# Altium PCB Mekatron.PcbDoc
Units mm, origin at the board's own origin, x right, y up, seen from the top; angles counter-clockwise.
Board outline 120 x 130 mm, 4 copper layers (Top Layer, Internal Plane 1, Internal Plane 2, Bottom Layer), stack 0.462 mm thick; 15 components, 49 nets, 206 pads, 0 vias.
Unrouted connection lines stored in the file: 1.
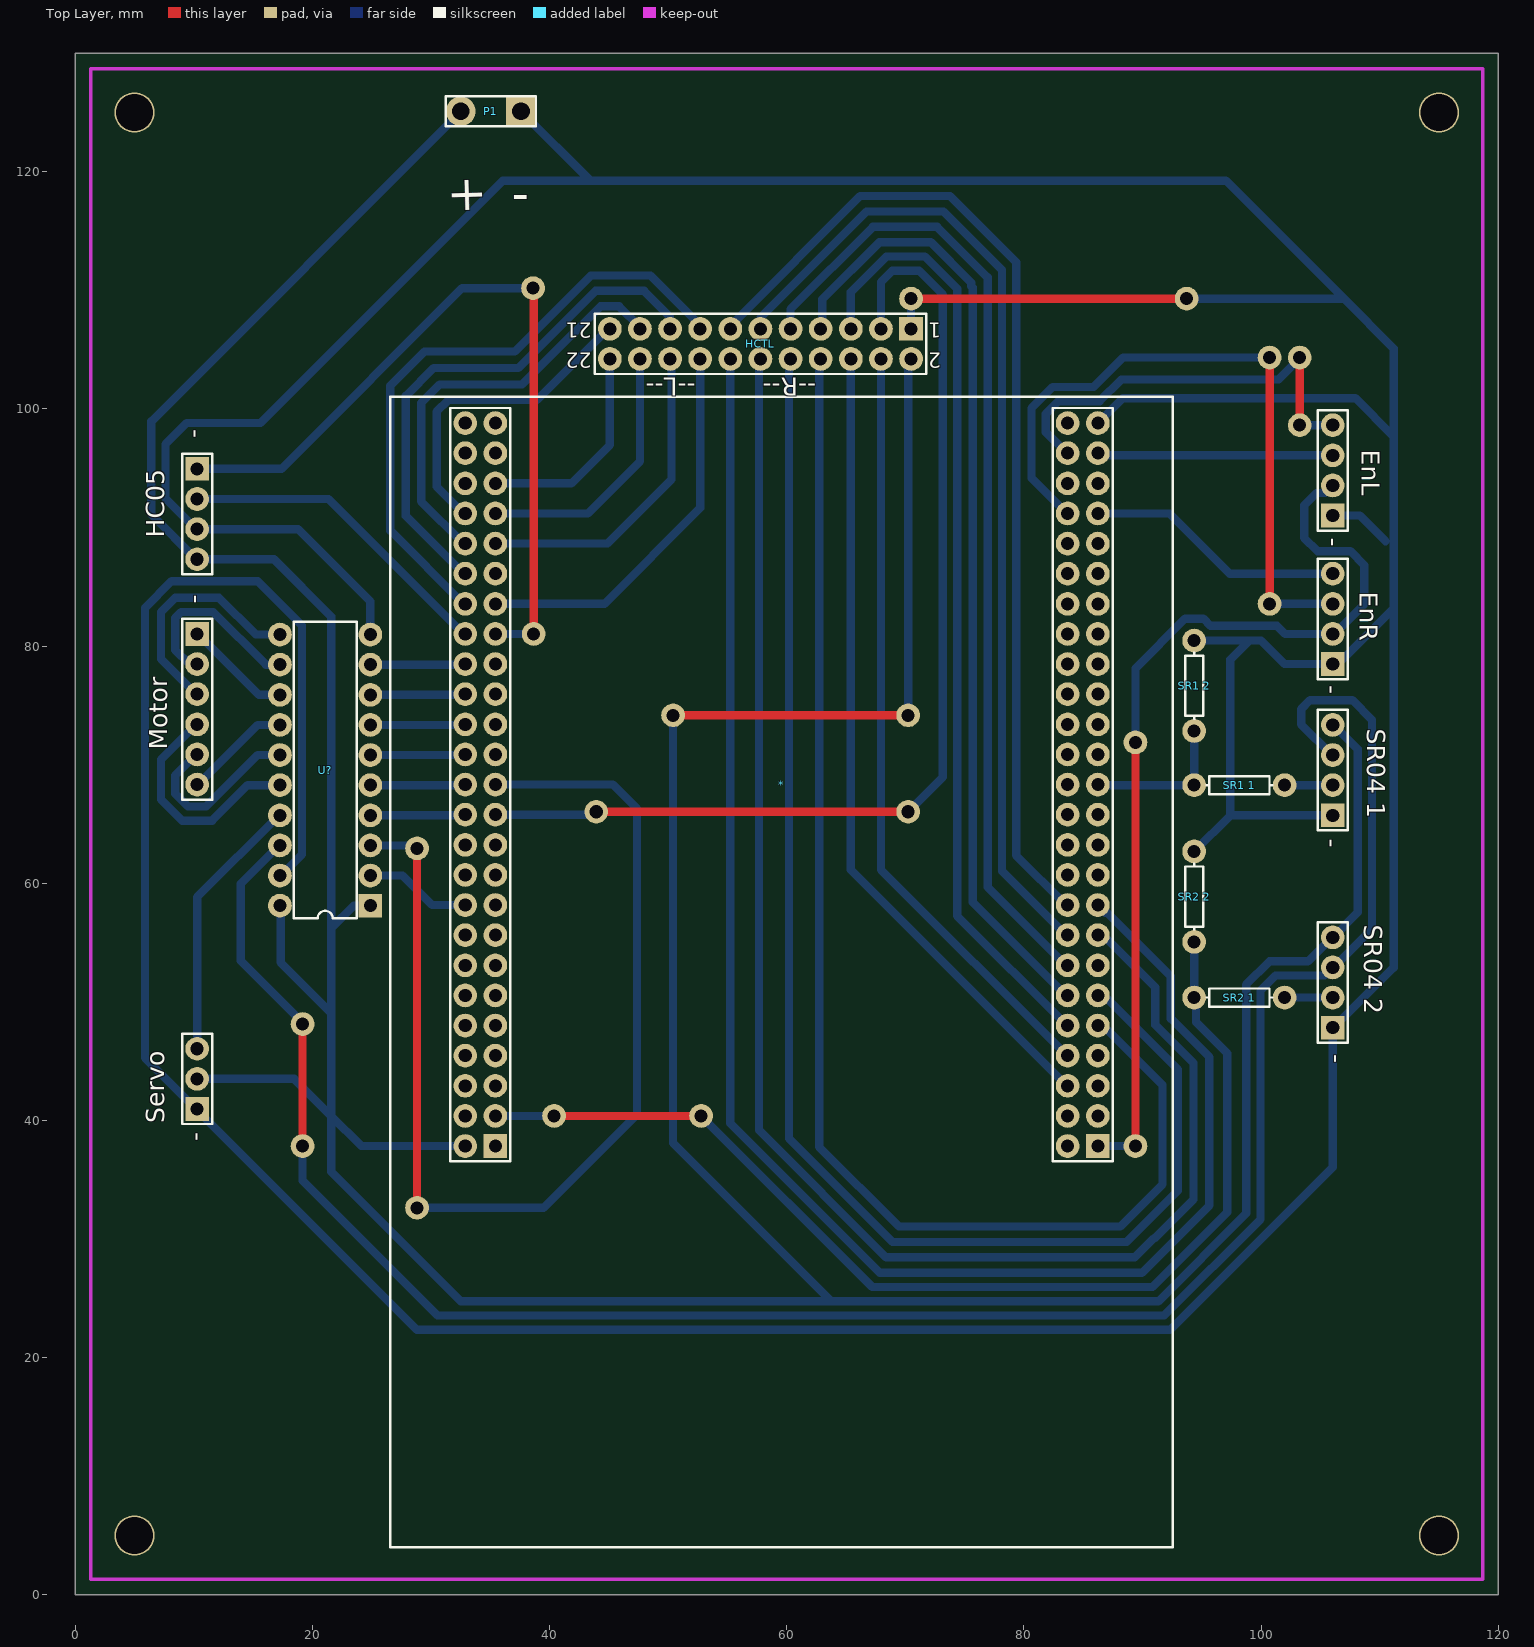
[diagram p0: Top Layer view]
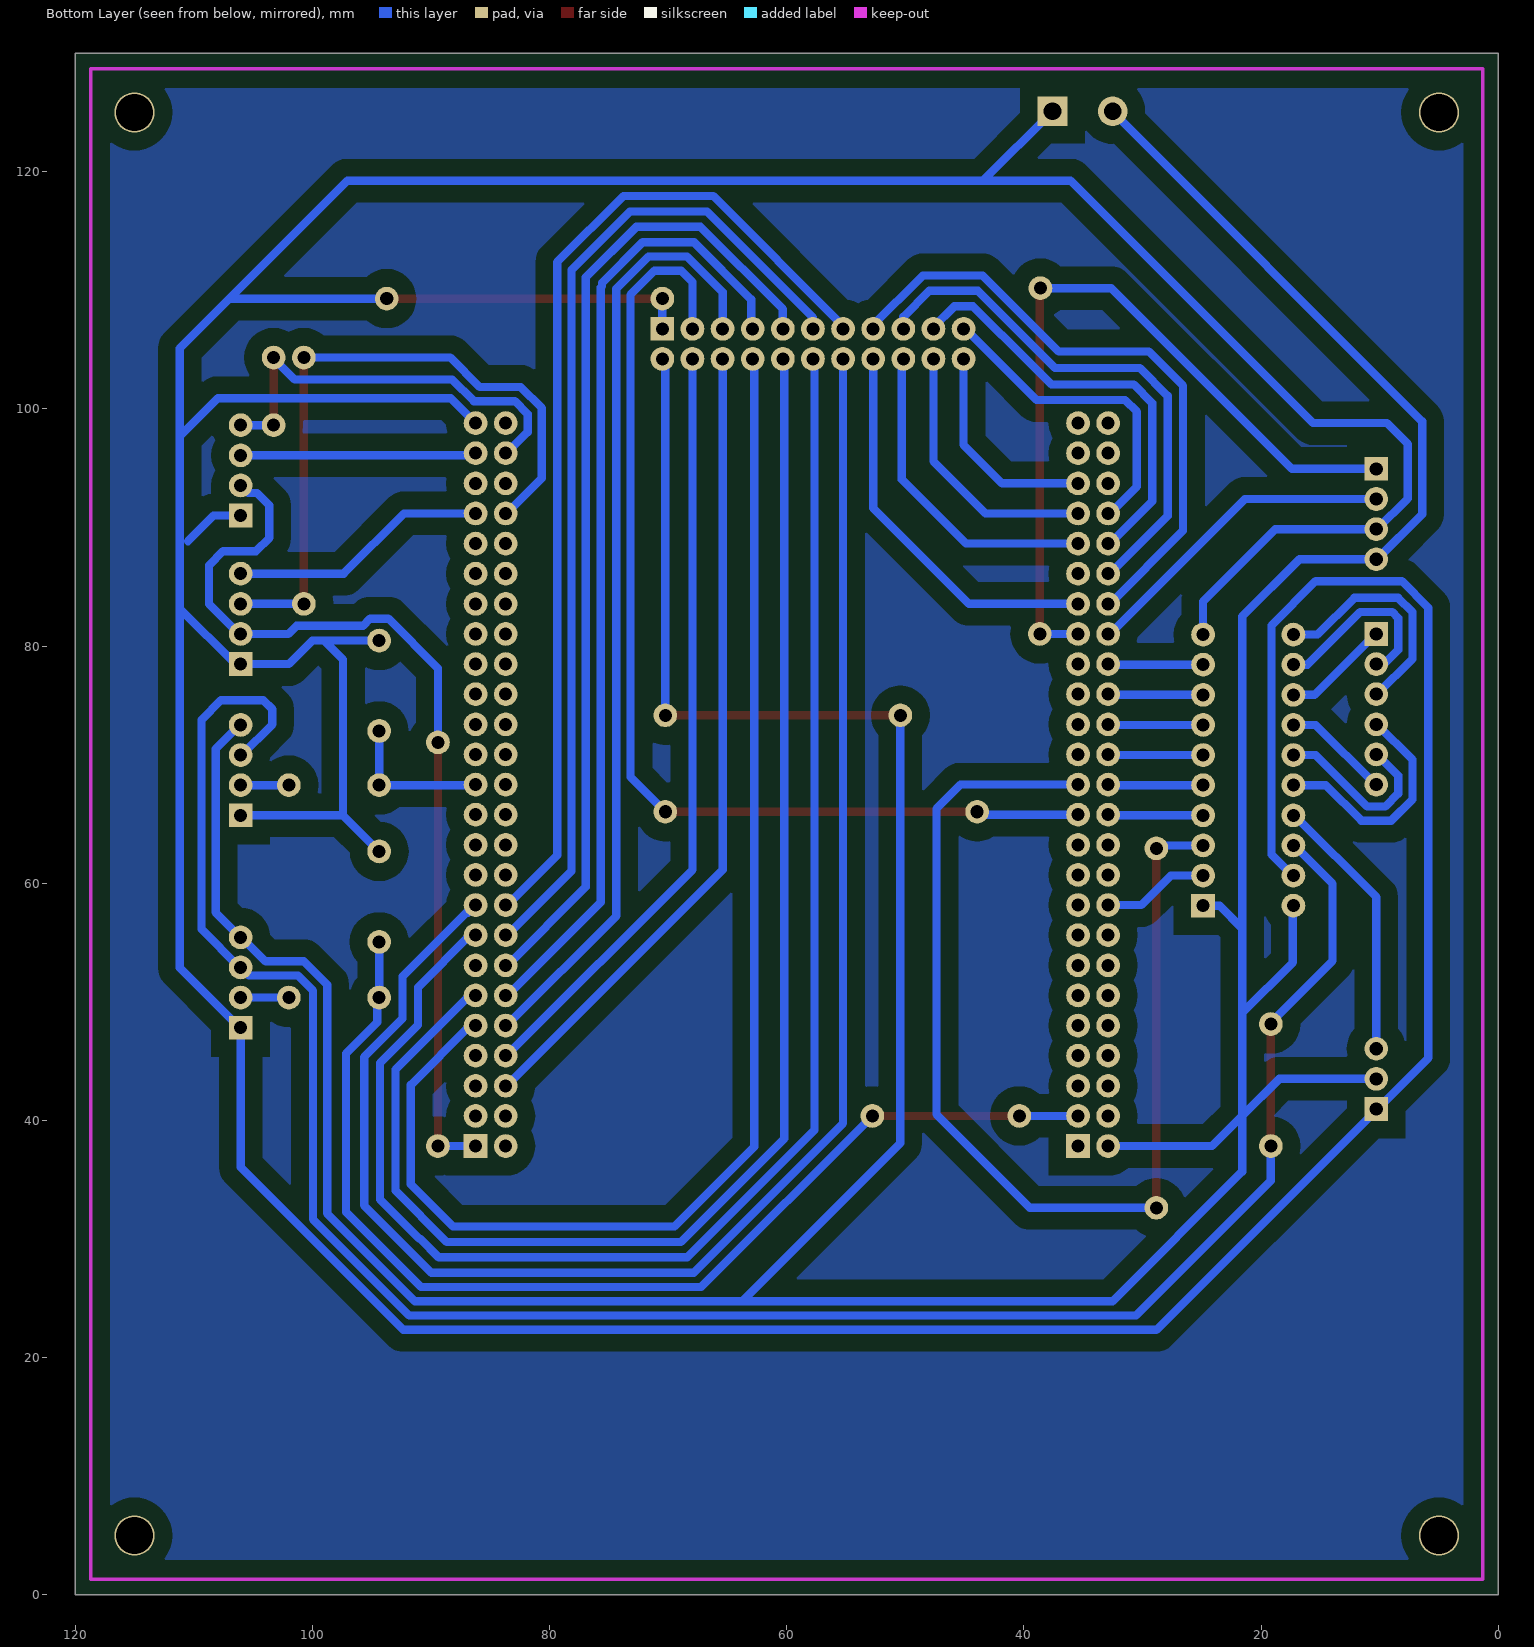
[diagram p1: Bottom Layer view, seen from below]
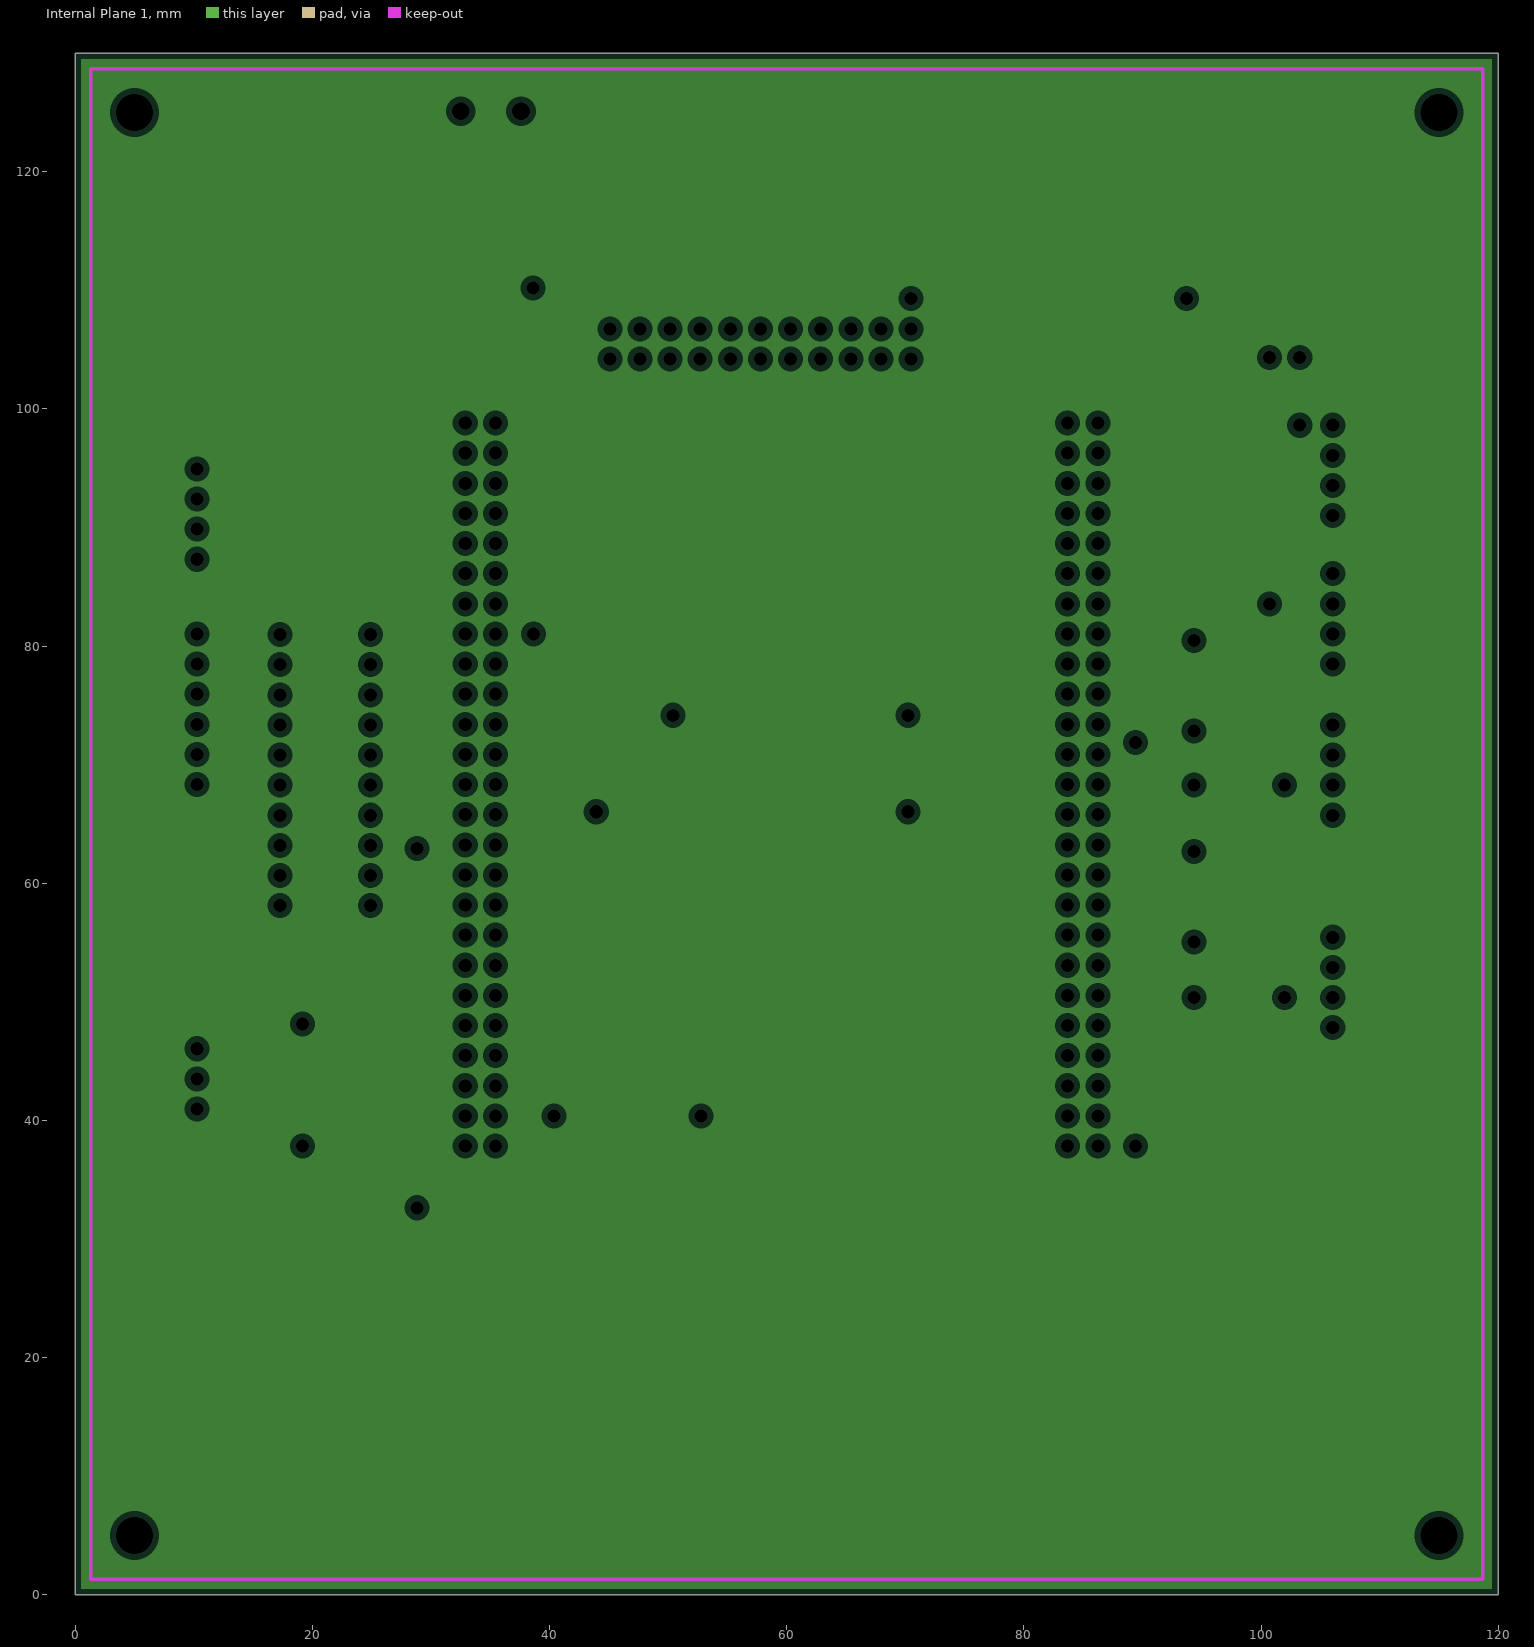
[diagram p2: Internal Plane 1, clearances drawn from the general rule]
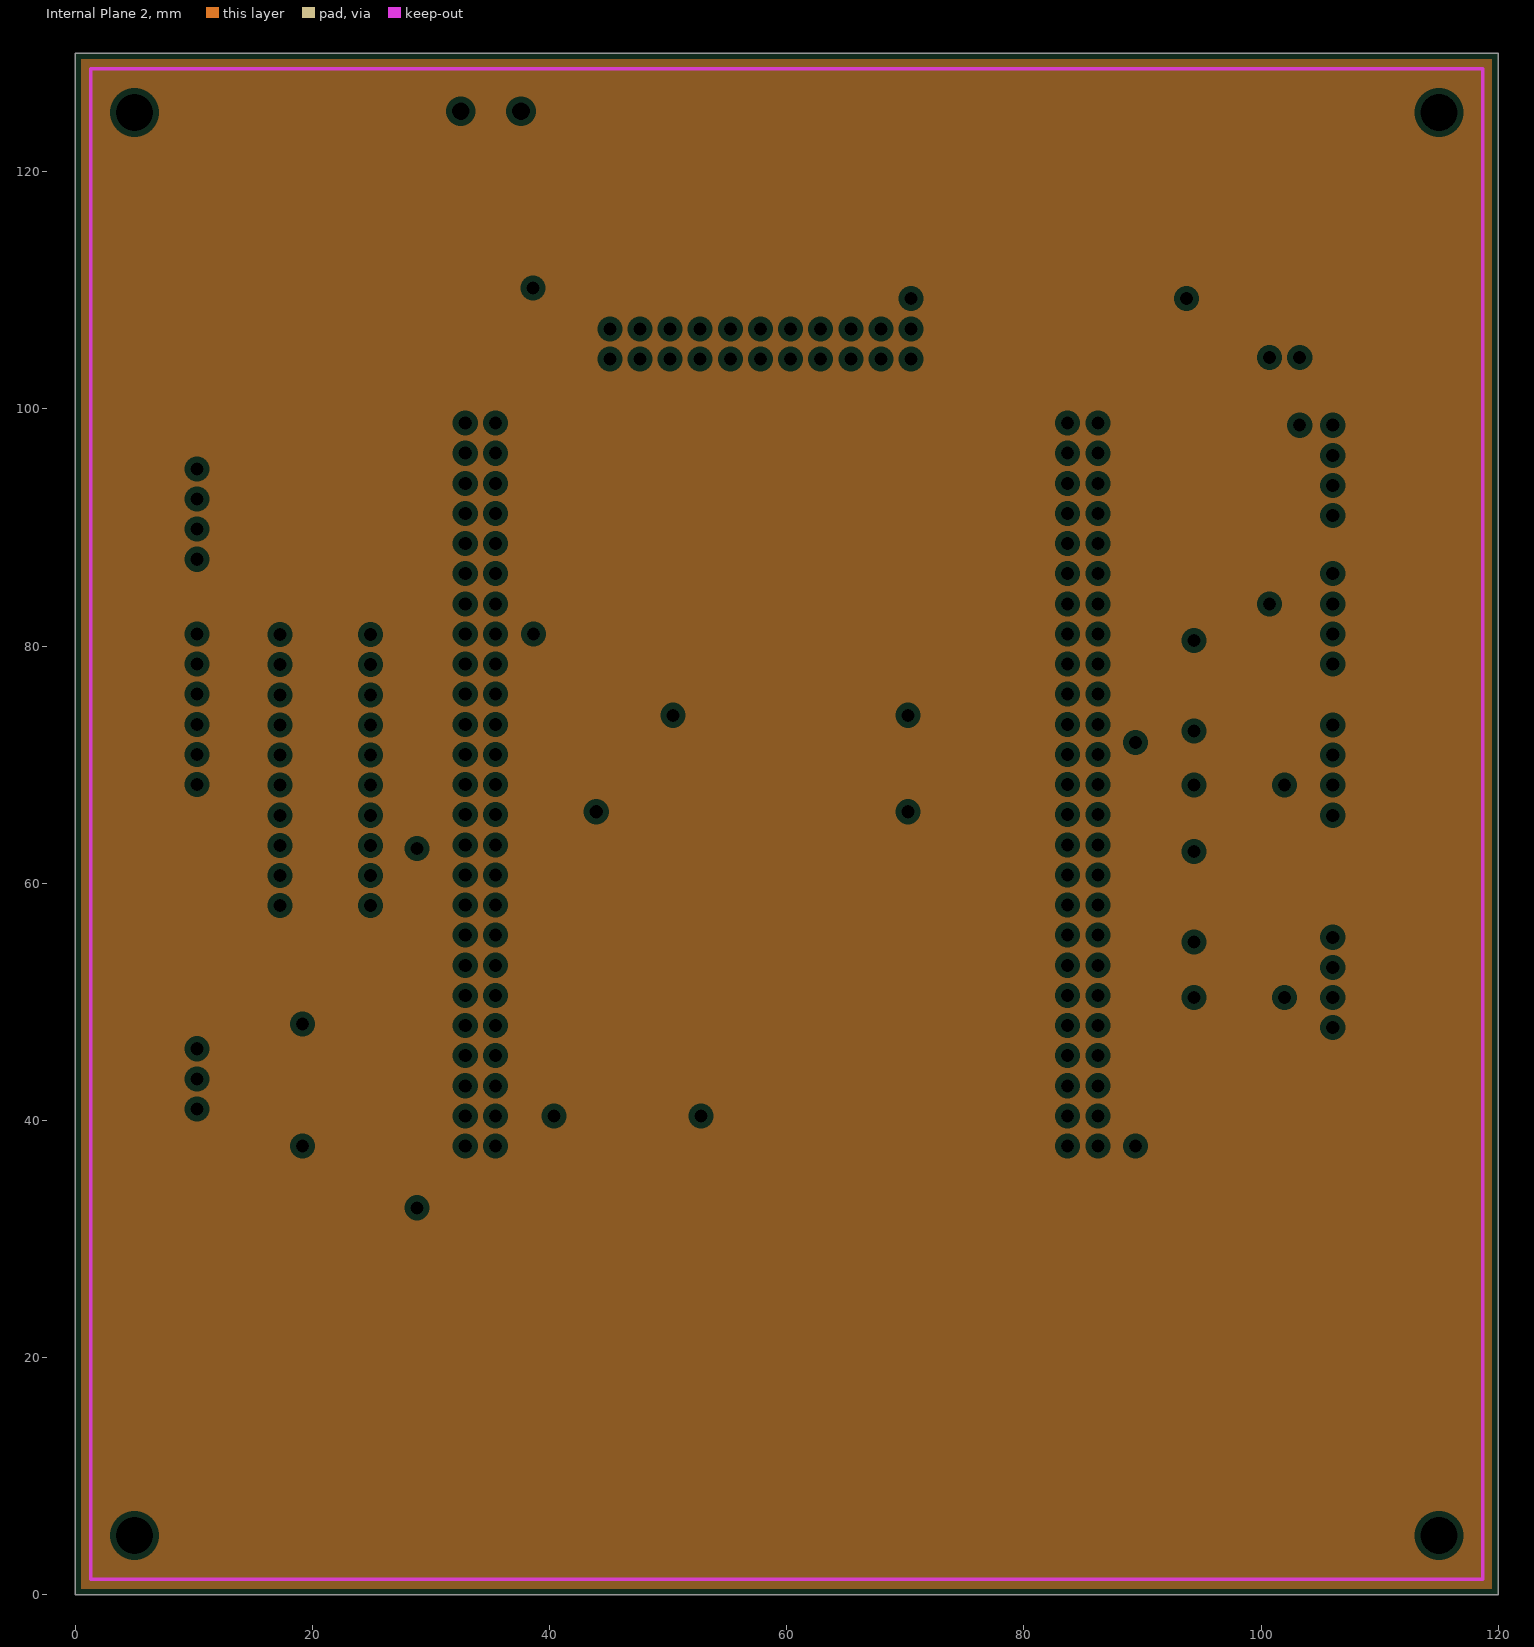
[diagram p3: Internal Plane 2, clearances drawn from the general rule]

## Layer stack, top to bottom
Top Solder: solder mask 0.0102, Solder Resist, Dk 3.5
Top Layer: signal copper 0.0356
Internal Plane 1: plane copper 0.0356
Internal Plane 2: plane copper 0.0356
Dielectric 1: dielectric 0.32, FR-4, Dk 4.8
Bottom Layer: signal copper 0.0356
Bottom Solder: solder mask 0.0102, Solder Resist, Dk 3.5

## Board outline
0,0 120,0 120,130 0,130

## Design rules (kind name [scope] priority, off if disabled: settings)
Clearance Polygon [inpolygon] p1: gap=1.5
Clearance [All] p2: gap=0.5
PlaneClearance [All] p1: clearance=0.508
PlaneConnect [All] p1: planeconnectstyle=Relief reliefexpansion=0.508 reliefentries=4 reliefconductorwidth=0.254 reliefairgap=0.254
PolygonConnect [All] p1: connectstyle=Relief reliefconductorwidth=0.254 reliefentries=4 polygonreliefangle="90 Angle" airgapwidth=0.254
RoutingVias [All] p1: holewidth=1.1 width=2 viastyle="Blind Buried (Adjacent Layers)" minholewidth=0.711 minwidth=1.27 maxholewidth=0.711 maxwidth=1.27
SolderMaskExpansion [All] p1: expansion=0.102
Width [All] p1: maxlimit=0.7 minlimit=0.7 preferedwidth=0.7
27 further rules are at their usual default settings.

## Components (designator, comment, footprint, x,y, rotation, side; value= is the part's Value field where it differs from the comment)
* "STM32F3Discovery" STM32F3 59.563,52.526 r180 top
EnL "Header 4" HDR1X4 106.045,91.007 r90 top (schematic designator EncoderL)
EnR "Header 4" HDR1X4 106.045,78.486 r90 top (schematic designator EncoderR)
HC05 "Header 4" HDR1X4 10.287,94.944 r270 top
HCTL "Header 11X2" HDR2X11 70.485,106.755 r180 top
Motor "Header 6" HDR1X6 10.287,81.026 r270 top
P1 "Header 3" HDR1X3#1 37.592,125.095 r180 top
Servo "Header 3" HDR1X3#2 10.287,40.969 r90 top
"SR1 1" "Res1" AXIAL-0.3 98.171,68.274 r0 top
"SR1 2" "Res1" AXIAL-0.3 94.361,76.656 r270 top
"SR2 1" "Res1" AXIAL-0.3 98.171,50.367 r0 top
"SR2 2" "Res1" AXIAL-0.3 94.361,58.876 r270 top
"SR04 1" "Header 4" HDR1X4 106.045,65.734 r90 top (schematic designator "HC-SR04 1")
"SR04 2" "Header 4" HDR1X4 106.045,47.827 r90 top (schematic designator "HC-SR04 2")
U? "SN74HC245N" N020 21.082,69.544 r90 top

## Footprints (in the part's own frame and the unit in brackets; to place one, negate y for a bottom-side part, rotate by r counter-clockwise, add the part's x,y. Pads: shape width x height; smd on the part's side, far side on the other; paste and mask are expansions set on the pad)
AXIAL-0.3 [mm] "Axial Device, Thru-Hole; 2 Leads; 0.3 in Pin Spacing"
  round 2 hole 1.1: 1(-3.81,0) 2(3.81,0)
  silkscreen extent -2.77,-0.76 2.77,0.76
HDR1X3#1 [mm] "Connector; Header; 3 Position"
  rect 2.5x2.5 hole 1.5: 1(0,0)
  round 0 all layers, no hole: 2(2.54,0)
  round 2.5 hole 1.5: 3(5.08,0)
  silkscreen extent -1.27,-1.27 6.35,1.27
HDR1X3#2 [mm] "Connector; Header; 3 Position"
  rect 2x2 hole 1.1: 1(0,0)
  round 2 hole 1.1: 2(2.54,0) 3(5.08,0)
  silkscreen extent -1.27,-1.27 6.35,1.27
HDR1X4 [mm] "Connector; Header; 4 Position"
  rect 2x2 hole 1.1: 1(0,0)
  round 2 hole 1.1: 2(2.54,0) 3(5.08,0) 4(7.62,0)
  silkscreen extent -1.27,-1.27 8.89,1.27
HDR1X6 [mm] "Connector; Header; 6 Position"
  rect 2x2 hole 1.1: 1(0,0)
  round 2 hole 1.1: 2(2.54,0) 3(5.08,0) 4(7.62,0) 5(10.16,0) 6(12.7,0)
  silkscreen extent -1.27,-1.27 13.97,1.27
HDR2X11 [mm] "Connector; Header; 11x2 Position"
  rect 2x2 hole 1.1: 1(0,0)
  round 2 hole 1.1: 2(0,2.54) 3(2.54,0) 4(2.54,2.54) 5(5.08,0) 6(5.08,2.54) 7(7.62,0) 8(7.62,2.54) 9(10.16,0) 10(10.16,2.54) 11(12.7,0) 12(12.7,2.54) 13(15.24,0) 14(15.24,2.54) 15(17.78,0) 16(17.78,2.54) 17(20.32,0) 18(20.32,2.54) 19(22.86,0) 20(22.86,2.54) 21(25.4,0) 22(25.4,2.54)
  silkscreen extent -1.27,-1.27 26.67,3.81
N020 [mm] "DIP; 20 Leads; Row Spacing 7.62 mm; Pitch 2.54 mm"
  rect 2x2 hole 1.1: 1(-11.43,-3.81)
  round 2 hole 1.1: 2(-8.89,-3.81) 3(-6.35,-3.81) 4(-3.81,-3.81) 5(-1.27,-3.81) 6(1.27,-3.81) 7(3.81,-3.81) 8(6.35,-3.81) 9(8.89,-3.81) 10(11.43,-3.81) 11(11.43,3.81) 12(8.89,3.81) 13(6.35,3.81) 14(3.81,3.81) 15(1.27,3.81) 16(-1.27,3.81) 17(-3.81,3.81) 18(-6.35,3.81) 19(-8.89,3.81) 20(-11.43,3.81)
  silkscreen extent -12.5,-2.65 12.5,2.65
STM32F3 [mm]
  rect 2x2 hole 1.1: 1(-26.67,14.68) 51(24.13,14.68)
  round 2 hole 1.1: 2(-24.13,14.68) 3(-26.67,12.14) 4(-24.13,12.14) 5(-26.67,9.6) 6(-24.13,9.6) 7(-26.67,7.06) 8(-24.13,7.06) 9(-26.67,4.52) 10(-24.13,4.52) 11(-26.67,1.98) 12(-24.13,1.98) 13(-26.67,-0.56) 14(-24.13,-0.56) 15(-26.67,-3.1) 16(-24.13,-3.1) 17(-26.67,-5.64) 18(-24.13,-5.64) 19(-26.67,-8.18) 20(-24.13,-8.18) 21(-26.67,-10.72) 22(-24.13,-10.72) 23(-26.67,-13.26) 24(-24.13,-13.26) 25(-26.67,-15.8) 26(-24.13,-15.8) 27(-26.67,-18.34) 28(-24.13,-18.34) 29(-26.67,-20.88) 30(-24.13,-20.88) 31(-26.67,-23.42) 32(-24.13,-23.42) 33(-26.67,-25.96) 34(-24.13,-25.96) 35(-26.67,-28.5) 36(-24.13,-28.5) 37(-26.67,-31.04) 38(-24.13,-31.04) 39(-26.67,-33.58) 40(-24.13,-33.58) 41(-26.67,-36.12) 42(-24.13,-36.12) 43(-26.67,-38.66) 44(-24.13,-38.66) 45(-26.67,-41.2) 46(-24.13,-41.2) 47(-26.67,-43.74) 48(-24.13,-43.74) 49(-26.67,-46.28) 50(-24.13,-46.28) 52(26.67,14.68) 53(24.13,12.14) 54(26.67,12.14) 55(24.13,9.6) 56(26.67,9.6) 57(24.13,7.06) 58(26.67,7.06) 59(24.13,4.52) 60(26.67,4.52) 61(24.13,1.98) 62(26.67,1.98) 63(24.13,-0.56) 64(26.67,-0.56) 65(24.13,-3.1) 66(26.67,-3.1) 67(24.13,-5.64) 68(26.67,-5.64) 69(24.13,-8.18) 70(26.67,-8.18) 71(24.13,-10.72) 72(26.67,-10.72) 73(24.13,-13.26) 74(26.67,-13.26) 75(24.13,-15.8) 76(26.67,-15.8) 77(24.13,-18.34) 78(26.67,-18.34) 79(24.13,-20.88) 80(26.67,-20.88) 81(24.13,-23.42) 82(26.67,-23.42) 83(24.13,-25.96) 84(26.67,-25.96) 85(24.13,-28.5) 86(26.67,-28.5) 87(24.13,-31.04) 88(26.67,-31.04) 89(24.13,-33.58) 90(26.67,-33.58) 91(24.13,-36.12) 92(26.67,-36.12) 93(24.13,-38.66) 94(26.67,-38.66) 95(24.13,-41.2) 96(26.67,-41.2) 97(24.13,-43.74) 98(26.67,-43.74) 99(24.13,-46.28) 100(26.67,-46.28)
  silkscreen extent -33,-48.5 33,48.5

## Part data
EnL EnR HC05 "SR04 1" "SR04 2": "Header, 4-Pin"
HCTL: "Header, 11-Pin, Dual row"
Motor: "Header, 6-Pin"
P1 Servo: "Header, 3-Pin"
"SR1 1" "SR1 2" "SR2 1" "SR2 2": "Resistor"
U?: "Octal Bus Transceiver with 3-State Outputs"

## Free pads (board coordinates)
  round 2 hole 1.1: 1(19.177,37.846) 1(19.177,48.133) 1(28.829,32.639) 1(28.829,62.948) 1(38.608,110.184) 1(38.66,81.026) 1(40.386,40.386) 1(43.942,66.032) 1(50.419,74.168) 1(52.78,40.386) 1(70.239,66.032) 1(70.239,74.168) 1(70.485,109.295) 1(89.408,37.846) 1(89.408,71.882) 1(93.726,109.295) 1(100.719,83.566) 1(100.719,104.334) 1(103.259,98.627) 1(103.259,104.334)
  round 3.4 hole 3.1: 4(5,5) 4(5,125) 4(115,5) 4(115,125)

## Nets (pads, with @x,y where several pads share a name; then routed paths per layer and width w, separated by ;. In a path a pad name is that pad's centre, name@x,y a point inside that pad or via, vN(x,y) a via of type N, cw(c..) or ccw(c..) an arc to the next point about the centre after c; other vN are vias at no path point)
3V: *.1 EnL.2 EnR.2 pad.1@89.408,37.846 pad.1@89.408,71.882 | length 81.1
  Top Layer w0.7: pad.1@89.408,37.846 pad.1@89.408,71.882
  Bottom Layer w0.7: *.1 pad.1@89.408,37.846 ; pad.1@89.408,71.882 89.408,78.129 93.595,82.316 95.127,82.316 95.727,81.716 101.337,81.716 102.027,81.026 EnR.2 ; EnL.2 105.405,92.907 104.672,92.907 103.632,91.867 103.632,89.131 104.757,88.006 107.522,88.006 108.712,86.816 108.712,83.546 EnR.2@106.192,81.026
5V: "SR04 1.4" "SR04 2.4" *.52 HC05.4 HCTL.2 P1.3 pad.1@50.419,74.168 pad.1@70.239,74.168 Servo.2 U?.1 U?.20 | length 387.4
  Top Layer w0.7: pad.1@50.419,74.168 pad.1@70.239,74.168
  Bottom Layer w0.7: Servo.2 18.467,43.509 21.59,40.386 ; U?.20@17.324,58.114 17.324,53.339 21.59,49.073 ; U?.1 23.495,58.114 21.59,56.209 ; P1.3@32.538,125.069 6.42,98.951 6.42,91.115 10.211,87.324 HC05.4 16.764,87.324 21.59,82.498 21.59,56.209 ; *.52 24.13,37.846 21.59,40.386 ; pad.1@50.419,74.168 50.419,38.1 63.767,24.752 ; pad.1@70.239,74.168 HCTL.2@70.239,103.969 ; 106.045,73.354 106.121,73.354 108.147,71.328 108.147,57.549 106.045,55.447 105.969,55.447 103.939,53.417 100.718,53.417 98.749,51.448 98.749,32.166 91.335,24.752 63.767,24.752 ; 21.59,40.386 21.59,49.073 ; 21.59,40.386 21.59,35.687 32.525,24.752 63.767,24.752 ; 21.59,49.073 21.59,56.209
GND: "SR1 2.1" "SR2 2.1" "SR04 1.1" "SR04 2.1" *.49 *.50 EnL.1 EnR.1 HC05.3 HCTL.1 P1.1 pad.1@70.485,109.295 pad.1@93.726,109.295 Servo.1 U?.10 U?.19 | length 536.9
  Top Layer w0.7: pad.1@70.485,109.295 pad.1@93.726,109.295
  Bottom Layer w0.7: 7.62,92.455 7.62,97.028 9.398,98.806 15.621,98.806 36.068,119.253 43.434,119.253 ; 7.671,92.404 10.211,89.864 HC05.3 18.796,89.864 24.892,83.768 U?.10 ; U?.19 17.348,60.654 19.122,62.428 19.122,81.74 15.391,85.471 8.136,85.471 5.892,83.227 5.892,45.288 28.828,22.352 92.329,22.352 106.045,36.068 106.045,47.827 106.121,47.827 111.182,52.888 111.182,83.185 ; P1.1 43.434,119.253 ; HCTL.1 pad.1@70.485,109.295 ; *.49 88.34,100.913 107.95,100.913 111.182,97.681 ; pad.1@93.726,109.295 106.986,109.295 ; 94.361,62.686 97.409,65.734 ; 94.361,80.466 100.001,80.466 101.981,78.486 EnR.1 106.483,78.486 111.182,83.185 ; 98.933,80.391 97.409,78.867 97.409,65.734 ; EnL.1@105.739,90.88 EnL.1@106.045,91.186 ; 106.045,65.734 97.409,65.734 ; EnL.1 108.331,91.007 110.49,88.848 ; 43.434,119.253 97.028,119.253 106.986,109.295 ; 106.986,109.295 111.182,105.099 111.182,97.681 ; 111.182,83.185 111.182,97.681
Net*_6: *.6 HCTL.6 | length 68.8
  Bottom Layer w0.7: HCTL.6 65.405,61.138 *.6@83.617,42.926
Net*_8: *.8 HCTL.4 | length 65.2
  Bottom Layer w0.7: HCTL.4 67.945,61.138 *.8@83.617,45.466
Net*_9: *.9 HCTL.8 | length 115.4
  Bottom Layer w0.7: HCTL.8@62.738,104.088 62.738,37.782 69.464,31.056 88.131,31.056 91.694,34.619 91.694,43.001 86.689,48.006 *.9
Net*_10: *.10 HCTL.5 | length 80.4
  Bottom Layer w0.7: HCTL.5 65.405,109.855 68.404,112.854 71.651,112.854 74.37,110.136 74.37,57.253 *.10@83.617,48.006
Net*_11: *.11 HCTL.10 | length 123.5
  Bottom Layer w0.7: HCTL.10@60.198,104.215 60.198,38.483 68.925,29.756 88.669,29.756 92.994,34.081 92.994,44.301 86.749,50.546 *.11
Net*_12: *.12 HCTL.7 | length 82
  Bottom Layer w0.7: HCTL.7@62.992,106.755 62.992,109.241 67.805,114.054 72.149,114.054 75.57,110.633 75.57,110.35 75.679,110.241 75.679,58.413 83.546,50.546 *.12
Net*_14: *.14 HCTL.9 | length 83.7
  Bottom Layer w0.7: HCTL.9 60.325,108.412 67.267,115.354 72.687,115.354 76.949,111.092 76.949,59.683 *.14@83.546,53.086
Net*_15: *.15 HCTL.12 | length 134
  Bottom Layer w0.7: HCTL.12@57.658,104.215 57.658,39.185 68.387,28.456 89.341,28.456 90.932,30.047 90.999,30.047 94.294,33.342 94.294,44.84 91.089,48.045 91.089,51.226 86.689,55.626 *.15
Net*_16: *.16 HCTL.11 | length 85.4
  Bottom Layer w0.7: HCTL.11 57.785,107.711 66.728,116.654 73.226,116.654 78.149,111.73 78.149,61.023 *.16@83.546,55.626
Net*_17: *.17 HCTL.14 | length 141.7
  Bottom Layer w0.7: HCTL.14 55.245,39.759 67.848,27.156 89.946,27.156 95.631,32.841 95.631,45.341 92.389,48.583 92.389,52.157 87.02,57.526 86.873,57.526 *.17
Net*_18: *.18 HCTL.13 | length 87.1
  Bottom Layer w0.7: HCTL.13@55.372,106.755 55.372,107.136 66.19,117.954 73.764,117.954 79.349,112.369 79.349,62.363 *.18@83.546,58.166
Net*_25: "SR1 1.1" "SR1 2.2" *.25 | length 12.7
  Bottom Layer w0.7: *.25 *.25@86.309,68.326 ; *.25@86.285,68.274 94.361,68.274 94.361,72.846
Net*_43: *.43 EnR.4 | length 21.9
  Bottom Layer w0.7: *.43 92.277,91.186 97.357,86.106 EnR.4
Net*_44: *.44 EnR.3 pad.1@100.719,83.566 pad.1@100.719,104.334 | length 58.2
  Top Layer w0.7: pad.1@100.719,83.566 pad.1@100.719,104.334
  Bottom Layer w0.7: *.44@83.617,91.186 80.643,94.16 80.643,100.069 82.43,101.856 85.889,101.856 88.367,104.334 pad.1@100.719,104.334 ; pad.1@100.719,83.566 EnR.3 EnR.3@106.192,83.566
Net*_47: *.47 EnL.3 | length 19.5
  Bottom Layer w0.7: *.47@86.412,96.087 EnL.3@105.918,96.087
Net*_48: *.48 EnL.4 pad.1@103.259,98.627 pad.1@103.259,104.334 | length 36
  Top Layer w0.7: pad.1@103.259,98.627 pad.1@103.259,104.334
  Bottom Layer w0.7: *.48 83.617,96.266 81.843,98.04 81.843,99.572 82.927,100.656 86.386,100.656 88.214,102.484 101.485,102.484 pad.1@103.259,104.258 ; pad.1@103.259,98.627 EnL.4
Net*_53: "SR2 1.1" "SR2 2.2" *.53 pad.1@40.386,40.386 pad.1@52.78,40.386 | length 94.3
  Top Layer w0.7: pad.1@40.386,40.386 pad.1@52.78,40.386
  Bottom Layer w0.7: *.53 pad.1@40.386,40.386 ; pad.1@52.78,40.386 67.214,25.952 90.838,25.952 97.155,32.269 97.155,45.656 94.518,48.293 94.518,50.21 94.361,50.367 94.361,55.066
Net*_68: *.68 U?.2 | length 9
  Bottom Layer w0.7: U?.2 27.611,60.654 30.099,58.166 *.68
Net*_73: *.73 HCTL.3 pad.1@43.942,66.032 pad.1@70.239,66.032 | length 90.1
  Top Layer w0.7: pad.1@43.942,66.032 pad.1@70.239,66.032
  Bottom Layer w0.7: *.73 43.696,65.786 pad.1@43.942,66.032 ; HCTL.3 67.945,110.698 68.901,111.654 71.154,111.654 73.17,109.639 73.17,68.963 pad.1@70.239,66.032
Net*_74: *.74 U?.4 | length 8
  Bottom Layer w0.7: U?.4 32.841,65.734 *.74
Net*_75: *.75 pad.1@28.829,32.639 pad.1@28.829,62.948 U?.3 | length 94.4
  Top Layer w0.7: pad.1@28.829,32.639 pad.1@28.829,62.948
  Bottom Layer w0.7: U?.3 pad.1@28.583,63.194 ; pad.1@28.829,32.639 39.497,32.639 47.371,40.513 47.371,66.294 45.339,68.326 *.75
Net*_76: *.76 U?.5 | length 8
  Bottom Layer w0.7: U?.5 32.841,68.274 *.76
Net*_78: *.78 U?.6 | length 8
  Bottom Layer w0.7: U?.6 32.841,70.814 *.78
Net*_80: *.80 U?.7 | length 8
  Bottom Layer w0.7: U?.7 32.841,73.354 *.80
Net*_82: *.82 U?.8 | length 8
  Bottom Layer w0.7: U?.8 32.841,75.894 *.82
Net*_84: *.84 U?.9 | length 8
  Bottom Layer w0.7: U?.9 32.841,78.434 *.84
Net*_85: *.85 HC05.1 pad.1@38.66,81.026 pad.1@38.608,110.184 | length 67
  Top Layer w0.7: pad.1@38.66,81.026 pad.1@38.66,110.184
  Bottom Layer w0.7: HC05.1 17.399,94.944 32.639,110.184 pad.1@38.608,110.184 ; *.85 pad.1@38.66,81.026
Net*_86: *.86 HC05.2 | length 27.3
  Bottom Layer w0.7: HC05.2 21.368,92.404 32.746,81.026 *.86
Net*_87: *.87 HCTL.16 | length 33.2
  Bottom Layer w0.7: *.87 44.629,83.566 52.705,91.642 HCTL.16
Net*_88: *.88 HCTL.15 | length 52.9
  Bottom Layer w0.7: *.88@32.746,83.566 26.58,89.732 26.58,101.966 29.464,104.85 37.073,104.85 43.478,111.255 48.519,111.255 52.832,106.942 HCTL.15@52.832,106.882
Net*_90: *.90 HCTL.17 | length 44.7
  Bottom Layer w0.7: *.90@32.746,86.106 27.88,90.972 27.88,101.107 30.226,103.453 37.373,103.453 40.585,106.665 43.875,109.955 47.981,109.955 50.165,107.771 HCTL.17@50.165,106.902
Net*_91: *.91 HCTL.18 | length 27.3
  Bottom Layer w0.7: *.91 44.883,88.646 50.292,94.055 HCTL.18@50.292,104.215
Net*_92: *.92 HCTL.19 | length 35.9
  Bottom Layer w0.7: *.92@32.746,88.646 29.18,92.212 29.18,100.502 30.734,102.056 37.673,102.056 41.819,106.202 41.845,106.202 44.298,108.655 45.872,108.655 HCTL.19@47.625,106.902
Net*_93: *.93 HCTL.20 | length 22.6
  Bottom Layer w0.7: *.93 43.232,91.186 47.625,95.579 HCTL.20
Net*_94: *.94 HCTL.21 | length 26.9
  Bottom Layer w0.7: *.94@32.746,91.186 30.48,93.452 30.48,99.77 31.466,100.756 38.939,100.756 HCTL.21@44.938,106.755
Net*_95: *.95 HCTL.22 | length 18.2
  Bottom Layer w0.7: *.95 41.835,93.726 45.085,96.976 HCTL.22
"NetHC-SR04 1_2": "SR1 1.2" "SR04 1.2" | length 4.1
  Bottom Layer w0.7: 101.981,68.274 106.045,68.274
"NetHC-SR04 1_3": "SR04 1.3" "SR04 2.3" pad.1@19.177,37.846 pad.1@19.177,48.133 U?.18 | length 181.1
  Top Layer w0.7: pad.1@19.177,37.846 pad.1@19.177,48.26
  Bottom Layer w0.7: U?.18 17.196,63.194 13.97,59.968 13.97,53.467 pad.1@19.177,48.26 ; pad.1@19.177,37.846 19.177,34.925 30.55,23.552 91.832,23.552 99.949,31.669 99.949,50.951 101.215,52.217 105.355,52.217 106.045,52.907 ; 105.969,70.814 103.378,73.405 103.378,74.676 104.14,75.438 107.696,75.438 109.347,73.787 109.347,56.133 106.121,52.907 ; 106.045,70.814 106.121,70.814
"NetHC-SR04 2_2": "SR2 1.2" "SR04 2.2" | length 4.1
  Bottom Layer w0.7: 101.981,50.367 106.045,50.367
NetMotor_1: Motor.1 U?.13 | length 9.1
  Bottom Layer w0.7: Motor.1 10.363,81.026 15.495,75.894 U?.13
NetMotor_2: Motor.2 U?.12 | length 15.3
  Bottom Layer w0.7: Motor.2@9.625,78.486 8.437,79.674 8.437,82.378 8.935,82.876 11.639,82.876 16.081,78.434 U?.12
NetMotor_3: Motor.3 U?.11 | length 20.1
  Bottom Layer w0.7: Motor.3 10.211,75.946 7.237,78.92 7.237,82.875 8.438,84.076 12.136,84.076 15.238,80.974 U?.11
NetMotor_4: Motor.4 U?.16 | length 19.7
  Bottom Layer w0.7: Motor.4 10.211,73.406 7.237,70.432 7.237,67.063 9.024,65.276 11.55,65.276 14.548,68.274 U?.16
NetMotor_5: Motor.5 U?.15 | length 15.2
  Bottom Layer w0.7: Motor.5 10.211,70.866 8.437,69.092 8.437,67.56 9.521,66.476 11.053,66.476 15.391,70.814 U?.15
NetMotor_6: Motor.6 U?.14 | length 9.1
  Bottom Layer w0.7: Motor.6 10.363,68.326 15.391,73.354 U?.14
NetServo_3: Servo.3 U?.17 | length 22.6
  Bottom Layer w0.7: Servo.3 10.287,58.825 17.196,65.734 U?.17
pads on no net: *.2 *.3 *.4 *.5 *.7 *.13 *.19 *.20 *.21 *.22 *.23 *.24 *.26 *.27 *.28 *.29 *.30 *.31 *.32 *.33 *.34 *.35 *.36 *.37 *.38 *.39 *.40 *.41 *.42 *.45 *.46 *.51 *.54 *.55 *.56 *.57 *.58 *.59 *.60 *.61 *.62 *.63 *.64 *.65 *.66 *.67 *.69 *.70 *.71 *.72 *.77 *.79 *.81 *.83 *.89 *.96 *.97 *.98 *.99 *.100 P1.2

## Polygon pours and split planes (outlines as drawn)
no net on Bottom Layer "Top Layer-No Net" (solid, pour order 10): 1.3,128.7 1.378,128.778 118.745,128.778 118.745,1.345 118.7,1.3 1.3,1.3

## Keep-outs
Keep-Out Layer:
  lines w0.3: 1.3,1.3 118.7,1.3 118.7,128.7 1.3,128.7 1.3,1.3

## Silkscreen, mask and mechanical layers (free items; w line width, h text height)
Top Overlay:
  text "+" at 31.369,116.713 h3 r1.59
  text "-" at 36.83,116.713 h3
  text "--L--" at 52.324,102.616 h1.52 r180
  text "--R--" at 62.484,102.616 h1.52 r180
  text "-" at 10.668,97.536 h1.52 r90
  text "-" at 105.41,89.154 h1.52 r270
  text "-" at 9.525,84.328 h1.52 r270
  text "-" at 105.283,76.708 h1.52 r270
  text "-" at 105.283,63.754 h1.52 r270
  text "-" at 105.664,45.593 h1.52 r270
  text "-" at 9.652,38.989 h1.52 r270
Drill Drawing:
  text ".LEGEND" at 125.08,5.08 h1.52
  text "Drill Drawing." at 125.08,2.54 h1.52

## Dimensions
1.3,1.3 to 118.7,1.3 on Mechanical 1
1.3,1.3 to 1.3,128.7 on Mechanical 1

## Text inside footprints (layer, text, board x,y; h text height)
HCTL: Top Overlay "1" at 73.025,107.263 h1.27 r180; Top Overlay "2" at 73.025,104.723 h1.27 r180; Top Overlay "21" at 43.561,107.263 h1.27 r180; Top Overlay "22" at 43.561,104.723 h1.27 r180